# Altium PCB Asfaloth_L2_AVI_ver1.1.PcbDoc (part 2 of 2)
Units mil, origin at the board's own origin, x right, y up, seen from the top; angles counter-clockwise.
Board outline 4135 x 4330.71 mil, 2 copper layers (Top Layer, Bottom Layer); 82 components, 201 nets, 508 pads, 1168 vias.
Unrouted connection lines stored in the file: 2.
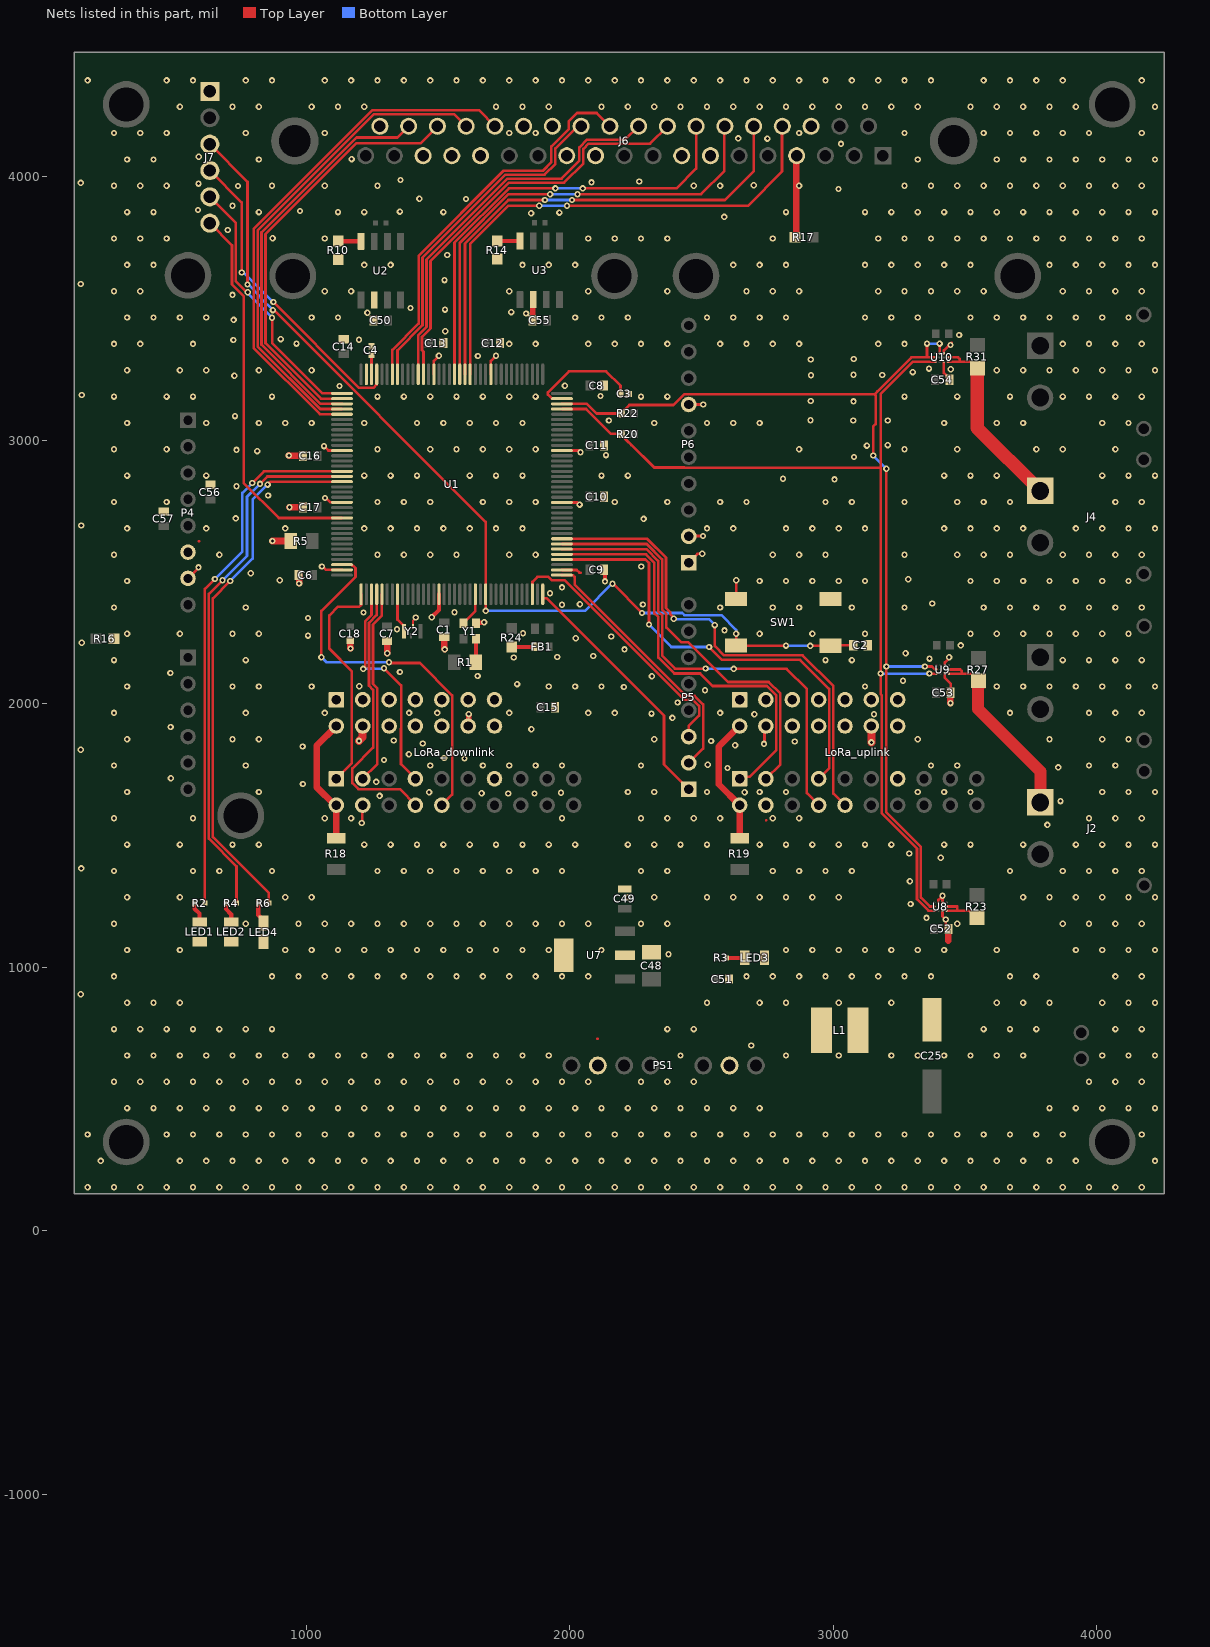
[diagram p2: the nets of this part, all layers, seen from the top]

## Via types
v1: diameter 24, hole 12, Top Layer to Bottom Layer, tented both sides, 1168 vias

## Nets (pads, with @x,y where several pads share a name; then routed paths per layer and width w, separated by ;. In a path a pad name is that pad's centre, name@x,y a point inside that pad or via, vN(x,y) a via of type N, cw(c..) or ccw(c..) an arc to the next point about the centre after c; other vN are vias at no path point) (continued)
GND: C1.2 C2.2 C3.2 C4.2 C6.2 C7.2 C8.2 C9.2 C10.2 C11.2 C12.2 C13.2 C14.2 C15.2 C16.2 C17.2 C18.2 C48.1 C49.2 C50.2 C52.2 C53.2 C54.2 C55.2 C56.2 C57.2 J6.4 J6.7 J6.8 J6.11 J6.12 J6.15 J6.16 J6.17 J6.22 J6.31 J6.32 J6.37 J7.1 LED1.1 LED2.1 LED3.1 LED4.1 LoRa_downlink.4 LoRa_downlink.24 LoRa_downlink.32 LoRa_uplink.4 LoRa_uplink.24 LoRa_uplink.32 P4.6 P4.7 P6.1 P6.2 P6.7 PS1.7 R5.2 R10.1 R14.1 R16.2 R17.1 SW1.3 SW1.4 U1.16 U1.38 U1.51 U1.61 U1.83 U1.94 U1.107 U1.120 U1.130 U1.143 U2.2 U3.2 U7.2 U7.4 U8.B3 U8.C1 U8.C3 U9.C1 U9.C3 U10.C1 U10.C3 Y1.2 Y2.2 | length 2676
  Top Layer w8: Y2.2@1406.38,2292.72 1406.38,2314.56 1416,2324.18 v1(1416,2327)
  Top Layer w10: R16.2@271.52,2247 R16.2@273,2248.48 ; C57.2@459,2730.56 C57.2@460,2729.56 ; P4.7@552,2475 592,2515 v1(592,2517) ; 593,2616 595,2616 ; C56.2@636,2831.56 C56.2@637,2830.56 ; v1(1060,2520) 1063.79,2520 1076.27,2507.52 U1.143@1136.28,2507.52 ; v1(1068,2977) 1084.72,2960.28 U1.120@1136.28,2960.28 ; v1(1072,2780) 1075.79,2780 1092.02,2763.77 1135.93,2763.77 U1.130@1136.28,2763.43 ; v1(1211,1547) 1213,1549 1213,1613 LoRa_downlink.4@1215,1615 ; LoRa_downlink.24@1214.43,1914.43 LoRa_downlink.24@1215,1915 ; C4.2@1248,3355.31 C4.2@1249.31,3354 ; U1.94@1484.7,3249.65 1484.7,3300.7 v1(1504,3320) ; C13.2@1520.5,3368.06 C13.2@1520.56,3368 ; U1.83@1701.24,3249.65 1701.24,3300.24 v1(1721,3320) ; C12.2@1736.12,3368 C12.2@1737,3368.88 ; U1.38@1970.92,2507.52 1971.27,2507.17 2026.83,2507.17 2037,2497 2042,2497 ; U1.51@1970.92,2763.43 2029.57,2763.43 v1(2038,2755) ; U1.61@1970.92,2960.28 2034.72,2960.28 v1(2041,2954) ; 2105,729 2106,728 ; PS1.7@2106,628 PS1.7@2107,627 ; C48.1@2299.05,1045.55 C48.1@2310.86,1057.36 ; P6.1@2452,2535 2485.41,2568.41 2502.41,2568.41 v1(2503,2569) ; P6.2@2452,2635 2453,2636 v1(2506,2636) ; P6.7@2452,3135 v1(2507,3135) ; SW1.4@2631.73,2396.77 2632,2397.04 v1(2632,2467.91) ; v1(2737.39,1847.39) 2739.57,1849.57 2739.57,1909.57 LoRa_uplink.24@2745,1915 ; LoRa_uplink.4@2745,1615 LoRa_uplink.4@2745.5,1614.5 ; 2745.5,1557.5 2746,1557 ; SW1.3@2990,2396.77 SW1.3@2994.23,2401 ; C2.2@3131.43,2221.58 C2.2@3132,2222.16 ; U8.B3@3399.25,1245.75 3399.25,1255.25 v1(3415,1271) U8.C3@3415,1245.75 ; U8.C1@3415,1214.25 3415,1192.87 v1(3427.21,1180.67) 3427.21,1155.36 C52.2@3437.56,1145 ; U10.C1@3419.75,3297.89 3419.75,3254.39 3441,3233.14 C54.2@3441,3229.2 ; U10.C3@3419.75,3329.39 3419.75,3340.75 v1@3449,3370 ; U9.C1@3423.75,2113.69 3423.75,2097.54 3445.56,2075.73 C53.2@3445.56,2041.43 ; U9.C3@3423.75,2145.18 3423.75,2155.86 3440,2172.11 v1(3440,2175.9)
  Top Layer w16: R10.1@1122.28,3685.2 R10.1@1122.56,3685.48 ; v1(1477,2328) 1504.39,2355.39 U1.16@1504.39,2415 ; Y1.2@1644.69,2305 1646.65,2306.97 1673.98,2306.97 v1(1675.51,2308.5) ; C55.2@1859,3455 C55.2@1860.28,3456.28 ; U3.2@1860.28,3531.5 U3.2@1861.56,3532.78 ; C10.2@2130,2785 C10.2@2131,2784 ; C9.2@2131,2508 2134,2505 v1(2134,2464)
  Top Layer w20: LoRa_downlink.32@1615,1915 1617.22,1917.22 v1(1617.22,1960.22) ; C55.2@1860.28,3456.28 U3.2@1860.28,3531.5
  Top Layer w25: v1(872,2617) R5.2@941.07,2617 ; v1(934.63,2941.63) 936.26,2940 C16.2@988.32,2940 ; v1(937,2745) C17.2@988.32,2745 ; C6.2@970.88,2487.83 973.74,2484.98 v1(973.74,2456) ; C18.2@1168,2238.43 1168,2210 v1(1168.5,2209.5) ; C50.2@1254,3452 C50.2@1256,3454 C50.2@1258.56,3456.56 ; C7.2@1307.44,2237.44 1307.44,2191.56 v1(1308,2191) ; C1.2@1524.44,2252.44 1524.44,2208.56 1526,2207 v1(1526,2206) ; J6.8@2425.39,4073.39 J6.8@2425.39,4079 ; J6.7@2532,4076.56 J6.7@2534.44,4079 ; R17.1@2859.48,3772 2860.55,3773.06 2860.55,4077.94 J6.4@2861.61,4079 ; 3436,1100 3436,1140.85 3434.71,1142.15 C52.2@3437.56,1145 ; v1(3445,2002) 3445,2040.87 C53.2@3445.56,2041.43
  Top Layer w30: v1(1200.69,1858.8) 1214.43,1872.54 LoRa_downlink.24@1214.43,1914.43 ; v1(3145,1853) LoRa_uplink.32@3145,1915
  other v1: 171,165 271,165 371,165 471,165 571,165 671,165 771,165 871,165 971,165 1071,165 1171,165 1271,165 1371,165 1471,165 1571,165 1671,165 1771,165 1871,165 1971,165 2071,165 2171,165 2271,165 2371,165 2471,165 2571,165 2671,165 2771,165 2871,165 2971,165 3071,165 3171,165 3271,165 3371,165 3471,165 3571,165 3671,165 3771,165 3871,165 3971,165 4071,165 4171,165 221,265 521,265 621,265 721,265 821,265 921,265 1021,265 1121,265 1221,265 1321,265 1421,265 1521,265 1621,265 1721,265 1821,265 1921,265 2021,265 2121,265 2221,265 2321,265 2421,265 2521,265 2621,265 2721,265 2821,265 2921,265 3021,265 3121,265 3221,265 3321,265 3421,265 3521,265 3621,265 3721,265 3821,265 3921,265 4221,265 171,365 471,365 571,365 671,365 771,365 871,365 971,365 1071,365 1171,365 1271,365 1371,365 1471,365 1571,365 1671,365 1771,365 1871,365 1971,365 2071,365 2171,365 2271,365 2371,365 2471,365 2571,365 2671,365 2771,365 2871,365 2971,365 3071,365 3171,365 3271,365 3371,365 3471,365 3571,365 3671,365 3771,365 3871,365 4171,365 321,465 421,465 521,465 621,465 721,465 821,465 921,465 1021,465 1121,465 1221,465 1321,465 1421,465 1521,465 1621,465 1721,465 1821,465 1921,465 2021,465 2121,465 2221,465 2321,465 2421,465 2521,465 2621,465 2721,465 3821,465 3921,465 4021,465 4121,465 4221,465 271,565 371,565 471,565 571,565 671,565 771,565 871,565 971,565 1071,565 1171,565 1271,565 1371,565 1471,565 1571,565 1671,565 1771,565 1871,565 1971,565 2071,565 2271,565 2371,565 2471,565 3971,565 4071,565 4171,565 321,665 421,665 521,665 621,665 721,665 821,665 921,665 1021,665 1121,665 1221,665 1321,665 1421,665 1521,665 1621,665 1721,665 1821,665 1921,665 2421,665 2821,665 3021,665 3221,665 3321,665 3421,665 3521,665 3621,665 3721,665 4021,665 4121,665 4221,665 2689,703 271,765 371,765 471,765 571,765 671,765 771,765 871,765 2371,765 2471,765 3571,765 3671,765 3771,765 4071,765 4171,765 321,865 421,865 521,865 2521,865 2721,865 2821,865 3021,865 3221,865 3621,865 3721,865 3821,865 4021,865 4121,865 4221,865 145,897 271,965 871,965 971,965 1071,965 1171,965 1271,965 1371,965 1471,965 1571,965 1671,965 1771,965 1871,965 1971,965 2071,965 2671,965 2771,965 2871,965 2971,965 3071,965 3171,965 3271,965 3371,965 3671,965 3771,965 4071,965 4171,965 2375,1049 321,1065 521,1065 921,1065 1021,1065 1121,1065 1221,1065 1321,1065 1421,1065 1521,1065 1621,1065 1721,1065 1821,1065 1921,1065 2121,1065 2821,1065 2921,1065 3021,1065 3121,1065 3221,1065 3321,1065 3421,1065 3621,1065 3921,1065 4021,1065 4121,1065 4221,1065 271,1165 771,1165 971,1165 1071,1165 1171,1165 1271,1165 1371,1165 1471,1165 1571,1165 1671,1165 1771,1165 1871,1165 1971,1165 2071,1165 2271,1165 2371,1165 3471,1165 3871,1165 3971,1165 4071,1165 4171,1165 3354,1187 3294,1240 321,1265 521,1265 921,1265 1021,1265 2221,1265 2321,1265 2521,1265 2621,1265 2721,1265 2821,1265 2921,1265 3021,1265 3721,1265 3821,1265 3921,1265 4021,1265 4121,1265 4221,1265 3291,1326 271,1365 571,1365 671,1365 871,1365 1271,1365 1371,1365 1471,1365 1571,1365 1671,1365 1771,1365 1871,1365 1971,1365 2271,1365 2371,1365 2771,1365 2871,1365 2971,1365 3071,1365 3671,1365 3871,1365 3971,1365 4071,1365 4171,1365 147,1375 3408,1415 3289,1431 321,1465 521,1465 721,1465 821,1465 1221,1465 1321,1465 1421,1465 1521,1465 1621,1465 1721,1465 1821,1465 1921,1465 2021,1465 2221,1465 2321,1465 2421,1465 2521,1465 2721,1465 2821,1465 2921,1465 3021,1465 3121,1465 3221,1465 3421,1465 3521,1465 3721,1465 3921,1465 4021,1465 4121,1465 4221,1465 3813,1540 271,1565 571,1565 1071,1565 1171,1565 1971,1565 2271,1565 2371,1565 2471,1565 2571,1565 2771,1565 2871,1565 3971,1565 4071,1565 4171,1565 3863,1630 1279,1650 1767,1659 1867,1659 1666,1660 1967,1662 1467,1664 2664,1664 321,1665 821,1665 2221,1665 2321,1665 2521,1665 2721,1665 2821,1665 3321,1665 3421,1665 3521,1665 4021,1665 4121,1665 4221,1665 988,1695 1266,1703 487,1717 2599,1756 3854,1758 271,1765 771,1765 1471,1765 1671,1765 1771,1765 1871,1765 1971,1765 2271,1765 3371,1765 3471,1765 3971,1765 4071,1765 2524,1768 1296,1786 1601,1792 1524,1794 1390,1808 145,1825 987,1837 2628,1842 1443,1849 2854,1856 2537,1858 1333,1860 321,1865 721,1865 821,1865 2321,1865 3321,1865 3821,1865 4021,1865 4121,1865 1855,1903 486,1911 2390,1946 2701,1960 3155,1960 2311,1962 271,1965 771,1965 1071,1965 1391,1965 1498,1965 1771,1965 2071,1965 2171,1965 2571,1965 3671,1965 3971,1965 4071,1965 4171,1965 2410,2004 2514,2051 2206,2063 321,2065 721,2065 821,2065 1021,2065 1921,2065 2021,2065 2121,2065 3121,2065 3621,2065 3721,2065 3821,2065 3921,2065 4021,2065 4121,2065 4221,2065 1202,2066 1801,2074 3265,2087 2311.98,2103.96 1651,2105 485,2116 1356,2120 271,2165 771,2165 2971,2165 3071,2165 3871,2165 3971,2165 4071,2165 4171,2165 3365.68,2170.81 1788,2175 1953,2177 2090,2181 3275,2191 2208,2206 3484,2221 149,2231 2023.43,2247.99 2158,2255 1007,2258 321,2265 521,2265 721,2265 821,2265 2721,2265 2921,2265 3121,2265 3521,2265 3621,2265 3721,2265 3821,2265 3921,2265 4021,2265 4121,2265 1823,2267 2588,2278 1345,2282 1007,2325 1218,2346 1563,2347 271,2365 771,2365 2571,2365 2771,2365 2871,2365 3071,2365 3271,2365 3571,2365 3671,2365 3771,2365 3871,2365 3971,2365 4071,2365 4171,2365 1971.02,2375.26 2278,2376 2039,2377 3376,2380 1925.83,2418.81 1971,2441 321,2465 2721,2465 2821,2465 2921,2465 3021,2465 3121,2465 3521,2465 3621,2465 3721,2465 3821,2465 3921,2465 4021,2465 4121,2465 900,2468 3285,2472 790,2495 2272,2520 271,2565 671,2565 1271,2565 1371,2565 1471,2565 1571,2565 1771,2565 1871,2565 2771,2565 2871,2565 2971,2565 3271,2565 3471,2565 3571,2565 3671,2565 3871,2565 3971,2565 4071,2565 4171,2565 321,2665 621,2665 921,2665 1221,2665 1321,2665 1421,2665 1521,2665 1621,2665 1721,2665 1821,2665 2521,2665 2621,2665 2821,2665 2921,2665 3021,2665 3121,2665 3421,2665 3521,2665 3621,2665 3721,2665 3921,2665 4021,2665 4121,2665 4221,2665 147,2676 2281,2701 733,2703 271,2765 471,2765 1271,2765 1371,2765 1471,2765 1671,2765 1771,2765 1871,2765 2171,2765 2371,2765 2571,2765 2671,2765 2971,2765 3071,2765 3271,2765 3471,2765 3571,2765 3671,2765 4071,2765 4171,2765 856,2790 736,2825 3005,2851 2810,2853 321,2865 621,2865 1221,2865 1321,2865 1421,2865 1621,2865 1721,2865 1821,2865 2121,2865 2221,2865 3421,2865 3521,2865 3621,2865 4021,2865 4121,2865 4221,2865 3079,2936 2138,2943 815,2958 736,2963 271,2965 471,2965 1271,2965 1471,2965 1571,2965 1671,2965 1771,2965 1871,2965 2871,2965 3271,2965 3471,2965 3771,2965 3871,2965 4071,2965 3128,2979 3207,2981 321,3065 621,3065 821,3065 921,3065 1021,3065 1221,3065 1421,3065 1521,3065 1621,3065 1721,3065 1821,3065 2321,3065 2521,3065 2621,3065 2721,3065 3421,3065 3621,3065 3721,3065 4021,3065 4121,3065 2149,3074 3076,3074 3207,3074 2914,3075 730,3091 3077,3147 2915,3148 271,3165 471,3165 571,3165 871,3165 1271,3165 1371,3165 1471,3165 1571,3165 1671,3165 1771,3165 1871,3165 2271,3165 2371,3165 3271,3165 3471,3165 3671,3165 3871,3165 3971,3165 4071,3165 4171,3165 2117,3167 149,3171 1127,3205 1982,3206 728,3244 2916,3246 3186,3247 3077,3248 3302,3258 321,3265 521,3265 621,3265 821,3265 1021,3265 3621,3265 3721,3265 3821,3265 3921,3265 4021,3265 4121,3265 4221,3265 3446,3269 3364,3271 2915,3306 3078,3308 1652,3319 3445,3361 271,3365 371,3365 571,3365 1771,3365 1871,3365 2071,3365 2171,3365 2271,3365 2371,3365 2571,3365 2671,3365 2771,3365 2871,3365 3171,3365 3271,3365 3871,3365 3971,3365 4071,3365 4171,3365 964,3366 724,3380 1201,3381 904,3383 3478,3399 1528,3413 725,3456 321,3465 421,3465 521,3465 621,3465 1021,3465 1121,3465 2021,3465 2121,3465 2221,3465 2521,3465 2621,3465 2721,3465 2821,3465 3121,3465 3221,3465 3321,3465 3521,3465 3621,3465 3721,3465 3821,3465 3921,3465 4021,3465 4121,3465 1835,3480 1232.72,3482.9 1778.6,3485.52 1527,3495 1396,3501 721,3551 271,3565 371,3565 1071,3565 1171,3565 1771,3565 2071,3565 2371,3565 2671,3565 2771,3565 2871,3565 3171,3565 3271,3565 3371,3565 3471,3565 3571,3565 3871,3565 3971,3565 4071,3565 4171,3565 145,3592 1525,3607 321,3665 421,3665 1221,3665 1321,3665 1821,3665 1921,3665 2021,3665 2621,3665 2721,3665 2821,3665 3121,3665 3221,3665 3321,3665 3421,3665 3521,3665 3821,3665 3921,3665 4021,3665 4121,3665 4221,3665 1536,3702 271,3765 371,3765 471,3765 1071,3765 2071,3765 2171,3765 2271,3765 2371,3765 2771,3765 3171,3765 3271,3765 3371,3765 3471,3765 3571,3765 3671,3765 3771,3765 3871,3765 3971,3765 4071,3765 4171,3765 873,3766 703,3797 2587,3847 1854,3861 1961,3863 321,3865 421,3865 821,3865 1121,3865 1221,3865 1521,3865 2821,3865 3121,3865 3221,3865 3321,3865 3421,3865 3521,3865 3621,3865 3721,3865 3821,3865 3921,3865 4021,3865 4121,3865 4221,3865 1356,3867 977,3869 590,3873 721,3889 1607,3915 1430,3916 3020,3953 742,3964 271,3965 371,3965 471,3965 871,3965 1071,3965 1271,3965 2471,3965 2571,3965 2871,3965 3271,3965 3371,3965 3471,3965 3571,3965 3671,3965 3771,3965 3871,3965 3971,3965 4071,3965 4171,3965 2699,3967 592,3973 145,3976 2083,3978 2264,3981 1358,3987 321,4065 421,4065 821,4065 3321,4065 3621,4065 3721,4065 3821,4065 3921,4065 4021,4065 4121,4065 4221,4065 1173,4066 593,4075 3030,4124 2750.29,4143.89 2640,4145 271,4165 371,4165 471,4165 771,4165 1071,4165 1771,4165 1871,4165 2871,4165 3271,4165 3571,4165 3671,4165 3771,4165 3871,4165 3971,4165 4171,4165 521,4265 721,4265 821,4265 1021,4265 1121,4265 1221,4265 1721,4265 1821,4265 1921,4265 2121,4265 2221,4265 2321,4265 2421,4265 2521,4265 2621,4265 2721,4265 2821,4265 2921,4265 3021,4265 3121,4265 3221,4265 3321,4265 3521,4265 3621,4265 3721,4265 3821,4265 3921,4265 4221,4265 171,4365 471,4365 571,4365 771,4365 871,4365 1071,4365 1171,4365 1271,4365 1371,4365 1471,4365 1571,4365 1671,4365 1771,4365 1871,4365 1971,4365 2071,4365 2171,4365 2271,4365 2371,4365 2471,4365 2571,4365 2671,4365 2771,4365 2871,4365 2971,4365 3071,4365 3171,4365 3271,4365 3371,4365 3571,4365 3671,4365 3771,4365 3871,4365 4171,4365
IN-_PM1: C25.1 L1.1 R23.2 U8.D1 U8.D2 | length 182.5
  Top Layer w10: U8.D1@3430.75,1214.25 3472,1214.25 ; U8.D2@3430.75,1230 3471,1230 3471,1215.25 3472,1214.25 ; R23.2@3545,1186.69 3544.21,1186.69 3521.65,1209.25 3521.65,1210.04 3517.44,1214.25 3472,1214.25
IN-_PM2: J2.P R27.2 U9.D1 U9.D2 | length 777.6
  Top Layer w10: U9.D1@3439.5,2113.69 3481.07,2113.69 3486,2113.69 ; U9.D2@3439.5,2129.43 3481.75,2129.43 3487.61,2123.58 3487.61,2115.29 3486,2113.69 ; R27.2@3574.35,2062.78 3574.35,2063.57 3551.79,2086.13 R27.2@3551,2086.13 3550.21,2086.13 3522.65,2113.69 3486,2113.69
  Top Layer w45: R27.2@3551,2086.13 3549.23,2084.35 3549.23,1980.08 3786.3,1743 J2.P@3786.3,1624.96
IN-_PM3: J4.P R31.2 U10.D1 U10.D2 | length 743.6
  Top Layer w10: U10.D1@3435.5,3297.89 3478.22,3297.89 ; U10.D2@3435.5,3313.64 3473.97,3313.64 3479.83,3307.78 3479.83,3299.5 3478.22,3297.89 ; R31.2@3547,3272.63 3546.21,3272.63 3520.95,3297.89 3483,3297.89 3478.22,3297.89
  Top Layer w50: R31.2@3547,3272.63 3547,3045.36 J4.P@3785.3,2807.06
MISO_SD: J6.34 U1.112 | length 1851.9
  Top Layer w10: U1.112@1136.28,3117.76 1053.82,3117.76 816,3355.57 816,3795 1258,4237 1561.28,4237 J6.34@1607.47,4190.81
MISO_U_LoRa_downlink: LoRa_downlink.8 U1.4 | length 1042.4
  Top Layer w10: U1.4@1268.17,2415 1268.17,2335.49 1239,2306.33 1239,2068.11 1254.53,2052.59 1254.53,1833.31 1175.47,1754.26 1175.47,1698.63 1198.63,1675.47 1355.53,1675.47 1415,1616 LoRa_downlink.8@1415,1615
MISO_U_LoRa_uplink: LoRa_uplink.8 U1.42 | length 1809.5
  Top Layer w10: U1.42@1970.92,2586.26 2291.17,2586.26 2336,2541.43 2336,2350.25 2352,2334.25 2352,2181 2400,2133 v1(2516,2133) ; v1(2623,2132) 2823,2132 2900,2055 2900,1660 LoRa_uplink.8@2945,1615
  Bottom Layer w10: v1(2516,2133) 2622,2133 v1(2623,2132)
MOSI_SD: J6.33 U1.113 | length 2018.8
  Top Layer w10: U1.113@1136.28,3098.07 1052.29,3098.07 801,3349.36 801,3801.21 1251.79,4252 1655.34,4252 J6.33@1716.53,4190.81
MOSI_U_LoRa_downlink: LoRa_downlink.3 U1.5 | length 743
  Top Layer w10: LoRa_downlink.3@1215,1715 1269.53,1769.53 1269.53,2058.8 1254,2074.33 1254,2300.11 1287.85,2333.96 U1.5@1287.85,2415
MOSI_U_LoRa_uplink: LoRa_uplink.3 U1.43 | length 1551.3
  Top Layer w10: U1.43@1970.92,2605.94 2292.7,2605.94 2351,2547.64 2351,2356.46 2367,2340.46 2367,2289 2423,2233 2449.9,2233 2600.9,2082 2755.11,2082 2799.53,2037.59 2799.53,1769.53 LoRa_uplink.3@2745,1715
NetANT_HF_U_LoRa_downlink_1: 
NetANT_HF_U_LoRa_uplink_1: 
NetANT_LF_U_LoRa_downlink_1: 
NetANT_LF_U_LoRa_uplink_1: 
NetC1_U_LoRa_downlink_2: 
NetC1_U_LoRa_uplink_2: 
NetC2_U_LoRa_downlink_2: 
NetC2_U_LoRa_uplink_2: 
NetC3_1: C3.1 U1.71 | length 431.8
  Top Layer w10: U1.71@1970.92,3157.13 1970.57,3157.47 1932.33,3157.47 1917.14,3172.67 1917.14,3180.95 1997.18,3261 2139,3261 2192.88,3207.12 C3.1@2192.88,3175
NetC4_1: C4.1 U1.106 | length 75.2
  Top Layer w10: C4.1@1248,3324.68 1248.24,3324.44 1248.24,3249.89 U1.106@1248.48,3249.65
NetC4_U_LoRa_downlink_2: 
NetC4_U_LoRa_uplink_2: 
NetC5_U_LoRa_downlink_2: 
NetC5_U_LoRa_uplink_2: 
NetC7_U_LoRa_downlink_2: 
NetC7_U_LoRa_uplink_2: 
NetC9_U_LoRa_downlink_1: 
NetC9_U_LoRa_downlink_2: 
NetC9_U_LoRa_uplink_1: 
NetC9_U_LoRa_uplink_2: 
NetC11_U_LoRa_downlink_2: 
NetC11_U_LoRa_uplink_2: 
NetC12_U_LoRa_downlink_1: 
NetC12_U_LoRa_uplink_1: 
NetC14_U_LoRa_downlink_1: 
NetC14_U_LoRa_uplink_1: 
NetC16_U_LoRa_downlink_2: 
NetC16_U_LoRa_uplink_2: 
NetC17_U_LoRa_downlink_2: 
NetC17_U_LoRa_uplink_2: 
NetC18_U_LoRa_downlink_1: 
NetC18_U_LoRa_uplink_1: 
NetC19_U_LoRa_downlink_1: 
NetC19_U_LoRa_downlink_2: 
NetC19_U_LoRa_uplink_1: 
NetC19_U_LoRa_uplink_2: 
NetC20_U_LoRa_downlink_1: 
NetC20_U_LoRa_downlink_2: 
NetC20_U_LoRa_uplink_1: 
NetC20_U_LoRa_uplink_2: 
NetC22_U_LoRa_downlink_1: 
NetC22_U_LoRa_uplink_1: 
NetC28_U_LoRa_downlink_1: 
NetC28_U_LoRa_downlink_2: 
NetC28_U_LoRa_uplink_1: 
NetC28_U_LoRa_uplink_2: 
NetC30_U_LoRa_downlink_2: 
NetC30_U_LoRa_uplink_2: 
NetC31_U_LoRa_downlink_1: 
NetC31_U_LoRa_uplink_1: 
NetC33_U_LoRa_downlink_1: 
NetC33_U_LoRa_uplink_1: 
NetC36_U_LoRa_downlink_1: 
NetC36_U_LoRa_downlink_2: 
NetC36_U_LoRa_uplink_1: 
NetC36_U_LoRa_uplink_2: 
NetC38_U_LoRa_downlink_1: 
NetC38_U_LoRa_downlink_2: 
NetC38_U_LoRa_uplink_1: 
NetC38_U_LoRa_uplink_2: 
NetC39_U_LoRa_downlink_1: 
NetC39_U_LoRa_downlink_2: 
NetC39_U_LoRa_uplink_1: 
NetC39_U_LoRa_uplink_2: 
NetC42_U_LoRa_downlink_1: 
NetC42_U_LoRa_uplink_1: 
NetFB1_2: FB1.2 R24.1 | length 87.5
  Top Layer w15: R24.1@1779.98,2215.48 FB1.2@1867.44,2215.48
NetL3_U_LoRa_downlink_2: 
NetL3_U_LoRa_uplink_2: 
NetL12_U_LoRa_downlink_1: 
NetL12_U_LoRa_uplink_1: 
NetLED1_2: LED1.2 R2.2 | length 79.7
  Top Layer w16: R2.2@575.82,1243.02 577.17,1241.67 577.17,1221.83 595.25,1203.75 LED1.2@595.25,1171.4
NetLED2_2: LED2.2 R4.2 | length 80
  Top Layer w16: R4.2@695.82,1243.02 695.82,1220.18 716,1200 LED2.2@716,1171.4
NetLED3_2: LED3.2 R3.2 | length 68.8
  Top Layer w15: R3.2@2595.75,1035 LED3.2@2664.6,1035
NetLED4_2: LED4.2 R6.2 | length 82.9
  Top Layer w16: R6.2@818.47,1243.02 818.47,1197.5 838.65,1177.32 LED4.2@838.65,1168.46
NetR1_1: R1.1 Y1.1 | length 88.9
  Top Layer w16: R1.1@1644.69,2157 Y1.1@1644.69,2245.94
NetR6_U_LoRa_downlink_1: 
NetR6_U_LoRa_uplink_1: 
NetR7_U_LoRa_downlink_1: 
NetR7_U_LoRa_uplink_1: 
NetR10_2: R10.2 U2.8 | length 86.1
  Top Layer w16: R10.2@1122.56,3754.52 1208.26,3754.52 U2.8@1208.56,3754.22
NetR10_U_LoRa_downlink_2: 
NetR10_U_LoRa_uplink_2: 
NetR14_2: R14.2 U3.8 | length 86.1
  Top Layer w16: R14.2@1725.56,3755.52 1811.26,3755.52 U3.8@1811.56,3755.22
NetU1_8: U1.8 Y2.3 | length 150
  Top Layer w10: U1.8@1346.91,2415 1346.91,2318.73 1370.95,2294.69 Y2.3@1370.95,2275
NetU1_23: U1.23 Y1.3 | length 128.7
  Top Layer w10: Y1.3@1597.44,2305 1597.18,2305.26 1597.18,2306.71 1642.18,2351.71 U1.23@1642.18,2415
NRESET_U_LoRa_downlink: LoRa_downlink.10 U1.142 | length 1438.2
  Top Layer w10: v1(1058,2176) 1058,2351.63 1187.61,2481.25 1187.61,2514.11 1178.3,2523.43 1175.98,2523.43 1172.2,2527.2 U1.142@1136.28,2527.2 ; v1(1315,2157) 1318,2154 1431.9,2154 1554.53,2031.37 1554.53,1998.63 1554,1998.1 1554,1931.9 1554.53,1931.37 1554.53,1654.53 LoRa_downlink.10@1515,1615
  Bottom Layer w10: v1(1058,2176) 1058.11,2176 1077.11,2157 v1(1315,2157)
NRESET_U_LoRa_uplink: LoRa_uplink.10 U1.44 | length 1896.5
  Top Layer w10: U1.44@1970.92,2625.63 2294.22,2625.63 2366,2553.85 2366,2362.67 2382,2346.67 2382,2338.79 2395,2325.79 v1(2395,2322) ; v1(2551,2298) 2551,2218.48 2586.25,2183.23 2883.77,2183.23 3001,2066 3001,1659 LoRa_uplink.10@3045,1615
  Bottom Layer w10: v1(2395,2322) 2396.53,2320.47 2528.53,2320.47 v1(2551,2298)
NRST_STM: C2.1 J7.3 SW1.1 SW1.2 U1.25 | length 3779.8
  Top Layer w10: J7.3@635,4123 777.81,3980.19 v1(777.81,3590.07) ; v1(874,3493) 878.01,3493 1681.55,2689.46 U1.25@1681.55,2415 1681.78,2414.78 1681.78,2352.22 v1(1682,2352) ; v1(2163,2455) 2164,2455 v1(2275,2344) ; v1(2631.73,2265) SW1.2@2631.73,2220.39 2632.13,2220 v1(2821,2220) ; v1(2913,2219) 2989,2219 SW1.1@2990,2220 2991.58,2221.58 C2.1@3076.31,2221.58
  Bottom Layer w10: v1(777.81,3590.07) 781.14,3590.07 827.46,3543.75 827.46,3539.54 v1(874,3493) ; v1(1682,2352) 2058.11,2352 2161.11,2455 v1(2163,2455) ; v1(2275,2344) 2427.1,2344 2435.63,2335.47 2576.53,2335.47 2631.73,2280.27 v1(2631.73,2265) ; v1(2821,2220) 2821.5,2219.5 2912.5,2219.5 v1(2913,2219)
NSS_SD: J6.35 U1.110 | length 1613.4
  Top Layer w10: U1.110@1136.28,3157.13 1056.87,3157.13 846,3368 846,3782 1190,4126 1433.61,4126 J6.35@1498.42,4190.81
NSS_U_LoRa_downlink: LoRa_downlink.7 U1.3 | length 845.2
  Top Layer w10: v1(1217,2132) 1218.14,2132 1224,2137.86 1224,2312.54 1248.48,2337.02 U1.3@1248.48,2415 ; v1(1296,2134) 1360.47,2069.53 1360.47,1904.57 1360,1904.1 1360,1770 LoRa_downlink.7@1415,1715
  Bottom Layer w10: v1(1217,2132) 1294,2132 v1(1296,2134)
NSS_U_LoRa_uplink: LoRa_uplink.7 U1.40 | length 1711.1
  Top Layer w10: U1.40@1970.92,2546.89 2288.11,2546.89 2301,2534 v1(2301,2300) ; v1(2529.33,2214.71) 2578.03,2166 2874,2166 2984.53,2055.47 2984.53,1754.53 LoRa_uplink.7@2945,1715
  Bottom Layer w10: v1(2301,2300) 2386,2215 2529.03,2215 v1(2529.33,2214.71)
PG9: R2.1 U1.124 | length 2027.2
  Top Layer w10: R2.1@616.18,1243.02 616.18,2435.18 v1(654,2473) ; v1(796,2837) 840.54,2881.54 U1.124@1136.28,2881.54
  Bottom Layer w10: v1(654,2473) 758,2577 758,2799 v1(796,2837)
PG10: R4.1 U1.125 | length 2037.6
  Top Layer w10: v1(683,2468) 631.18,2416.18 631.18,1487.61 736.18,1382.61 R4.1@736.18,1243.02 ; v1(825,2834) 853,2862 1136.13,2862 U1.125@1136.23,2861.9
  Bottom Layer w10: v1(683,2468) 776,2561 776,2785 v1(825,2834)
PG11: R6.1 U1.126 | length 2049
  Top Layer w10: v1(712,2465) 646.18,2399.18 646.18,1493.82 858.83,1281.17 R6.1@858.83,1243.02 ; v1(854,2831) 865.17,2842.17 U1.126@1136.28,2842.17
  Bottom Layer w10: v1(712,2465) 797,2550 797,2774 v1(854,2831)
RTS_IMU: P5.3 U1.34 | length 1023.5
  Top Layer w10: U1.34@1858.72,2415 1859.06,2415.35 1859.06,2462.36 1878.05,2481.34 1919.49,2481.34 1932.83,2468 1981.89,2468 2435.36,2014.53 2468.37,2014.53 2491.53,1991.37 2491.53,1954.53 2452,1915 P5.3@2452,1875
RX_IMU: P5.2 U1.37 | length 1000.8
  Top Layer w10: U1.37@1970.92,2487.83 1971.27,2487.49 2012.58,2487.49 2019,2481.07 2019,2452.1 2441.57,2029.53 2474.59,2029.53 2506.53,1997.59 2506.53,1829.53 P5.2@2452,1775
RXTX_RF_sx_U_LoRa_downlink: 
RXTX_RF_sx_U_LoRa_uplink: 
RXTX_U_LoRa_downlink: LoRa_downlink.13
RXTX_U_LoRa_uplink: LoRa_uplink.13
SCK_SD: J6.36 U1.111 | length 1549.8
  Top Layer w10: U1.111@1136.28,3137.44 1055.35,3137.44 831,3361.79 831,3788.21 1191.12,4148.33 1346.88,4148.33 J6.36@1389.36,4190.81
SCK_U_LoRa_downlink: LoRa_downlink.1 U1.1 | length 857.7
  Top Layer w10: LoRa_downlink.1@1115,1715 1173.79,1773.79 1173.79,2122.42 1088,2208.21 1088,2335 1121,2368 1202.35,2368 1208.76,2374.42 1208.76,2414.65 U1.1@1209.11,2415
SCK_U_LoRa_uplink: LoRa_uplink.1 U1.41 | length 1629.4
  Top Layer w10: U1.41@1970.92,2566.57 2289.64,2566.57 2321,2535.21 2321,2344.03 2337,2328.03 2337,2174.79 2397.26,2114.53 2495.47,2114.53 2543,2067 2748.9,2067 2784.53,2031.37 2784.53,1823.53 2683.67,1722.67 2652.67,1722.67 LoRa_uplink.1@2645,1715
SCL_STM: R20.1 U1.69 U8.A1 U9.A1 U10.A1 | length 3830.6
  Top Layer w10: U1.69@1970.92,3117.76 2062.67,3117.76 2156.43,3024 2193.25,3024 2199.25,3018 2222.55,2992.78 2234.26,2981.06 2318.32,2898.85 2321.24,2896 2325.32,2896 2435.1,2896 2435.63,2895.47 3180,2895.47 ; v1(3365,2114) 3391.94,2114 U9.A1@3392.25,2113.69 ; U8.A1@3383.5,1214.25 3361.53,1214.25 3318,1257.79 3318,1450 3184.53,1583.47 3184.53,2031.37 3180,2035.9 v1(3180,2114) 3180,2895.47 ; U10.A1@3388.25,3297.89 3302.89,3297.89 3180,3175 3180,2895.47
  Bottom Layer w10: v1(3180,2114) v1(3365,2114)
SCL_U_LoRa_downlink: LoRa_downlink.23
SCL_U_LoRa_uplink: LoRa_uplink.23
SDA_STM: R22.1 U1.70 U8.A2 U9.A2 U10.A2 U10.B3 | length 3905
  Top Layer w10: U1.70@1970.92,3137.44 2065.56,3137.44 2102,3101 R22.1@2195.44,3101 2195.44,3102.06 2226.38,3133 2394.1,3133 2435.63,3174.53 3154.47,3174.53 ; v1(3152,2941.75) 3152,3051.39 3161,3060.39 3161,3170 3158.5,3172.5 ; 3157.17,3173.17 3168,3184 3168,3184.21 3297.42,3313.64 3358.54,3313.64 ; v1(3202,2891) v1(3202,2141) 3202,1587.21 3333,1456.21 3333,1264 3367,1230 U8.A2@3383.5,1230 ; v1(3348,2141) 3375.22,2141 3386.79,2129.43 U9.A2@3392.25,2129.43 ; v1(3356,3366) 3356,3316.18 3358.54,3313.64 ; U10.A2@3388.25,3313.64 3358.54,3313.64 ; U10.B3@3404,3329.39 v1(3404,3366)
  Bottom Layer w10: v1(3152,2941.75) 3152,2941 v1(3202,2891) ; v1(3202,2141) v1(3348,2141) ; v1(3356,3366) v1(3404,3366)
SDA_U_LoRa_downlink: LoRa_downlink.21
SDA_U_LoRa_uplink: LoRa_uplink.21
Spare_DIO0: J6.23 U1.87 | length 1964.3
  Top Layer w10: U1.87@1622.5,3249.65 1622.5,3744.5 1767,3889 v1(1885,3889) ; v1(1989.89,3889) 2676,3889 2806,4019 2806,4189.73 J6.23@2807.08,4190.81
  Bottom Layer w10: v1(1885,3889) v1(1989.89,3889)
Spare_DIO1: J6.24 U1.88 | length 1875.9
  Top Layer w10: U1.88@1602.81,3249.65 1602.81,3746.02 1767.79,3911 v1(1906,3911) ; v1(2009,3911) 2589,3911 2698.02,4020.02 J6.24@2698.02,4190.81
  Bottom Layer w10: v1(1906,3911) v1(2009,3911)
Spare_DIO2: J6.25 U1.89 | length 1786.6
  Top Layer w10: U1.89@1583.13,3249.65 1583.13,3747.55 1768.57,3933 v1(1926,3933) ; v1(2030,3933) 2499,3933 2587.39,4021.39 J6.25@2587.39,4192.39
  Bottom Layer w10: v1(1926,3933) v1(2030,3933)
Spare_DIO3: J6.26 U1.90 | length 1693.1
  Top Layer w10: U1.90@1563.44,3249.65 1563.44,3749.08 1769.36,3955 v1(1946,3955) ; v1(2050,3955) 2405,3955 2479.91,4029.91 J6.26@2479.91,4190.81
  Bottom Layer w10: v1(1946,3955) v1(2050,3955)
Spare_RX: J6.28 U1.97 | length 1493
  Top Layer w10: U1.97@1425.65,3249.65 1425.65,3334.53 1425.09,3335.08 1425.09,3397.65 1457,3429.56 1457,3685.07 1763.93,3992 1969,3992 2037,4060 2037,4111 2066,4140 2210.99,4140 J6.28@2261.8,4190.81
Spare_TX: J6.27 U1.96 | length 1587.6
  Top Layer w10: U1.96@1445.33,3249.65 1445.33,3336.05 1440.09,3341.3 1440.09,3391.43 1472,3423.35 1472,3678.85 1770.15,3977 1979,3977 2052,4050 2052,4104.79 2072.21,4125 2305.05,4125 J6.27@2370.86,4190.81
SWO: J7.6 U1.133 | length 1466.6
  Top Layer w10: J7.6@635,3823 718.81,3739.19 718.81,3590.17 763,3545.99 763,2838 896.63,2704.37 U1.133@1136.28,2704.37
SX_GPIO0_U_LoRa_downlink: LoRa_downlink.25
SX_GPIO0_U_LoRa_uplink: LoRa_uplink.25
SX_GPIO1_U_LoRa_downlink: LoRa_downlink.26
SX_GPIO1_U_LoRa_uplink: LoRa_uplink.26
SX_GPIO2_U_LoRa_downlink: LoRa_downlink.27
SX_GPIO2_U_LoRa_uplink: LoRa_uplink.27
SX_GPIO3_U_LoRa_downlink: LoRa_downlink.28
SX_GPIO3_U_LoRa_uplink: LoRa_uplink.28
SX_GPIO4_U_LoRa_downlink: LoRa_downlink.29
SX_GPIO4_U_LoRa_uplink: LoRa_uplink.29
SX_GPIO5_U_LoRa_downlink: LoRa_downlink.30
SX_GPIO5_U_LoRa_uplink: LoRa_uplink.30
SX_GPIO6_U_LoRa_downlink: LoRa_downlink.31
SX_GPIO6_U_LoRa_uplink: LoRa_uplink.31
SX_GPIO7_U_LoRa_downlink: LoRa_downlink.33
SX_GPIO7_U_LoRa_uplink: LoRa_uplink.33
TCK: J7.5 U1.109 | length 999.1
  Top Layer w10: J7.5@635,3923 733.81,3824.19 733.81,3602.07 774.79,3561.1 v1(779,3561.1) ; v1(871,3464) 871,3369 1062.6,3177.4 1135.68,3177.4 U1.109@1136.28,3176.81
  Bottom Layer w10: v1(779,3561.1) 781.68,3558.42 781.68,3553.82 871,3464.5 v1(871,3464)
TMS: J7.4 U1.105 | length 1174.4
  Top Layer w10: J7.4@635,4023 755.81,3902.19 v1(755.81,3636) ; v1(876,3524) 1201.69,3198.31 1255.07,3198.31 1267.82,3211.06 1267.82,3249.3 U1.105@1268.17,3249.65
  Bottom Layer w10: v1(755.81,3636) 763,3636 875,3524 v1(876,3524)
TX_IMU: P5.1 U1.36 | length 977.8
  Top Layer w10: U1.36@1898.09,2415 1898.09,2400.79 1898.92,2399.95 1913.13,2399.95 2358,1955.09 2358,1769.21 2417,1710.21 2417,1710 P5.1@2452,1675
UART2TTL_RX: J6.29 U1.102 | length 1514.2
  Top Layer w10: U1.102@1327.22,3249.65 1327.22,3342.21 1427,3441.99 1427,3699 1750,4022 1898.57,4022 1931,4054.43 1931,4114 1997,4180 1997,4210 2028,4241 2102.56,4241 J6.29@2152.75,4190.81
UART2TTL_TX: J6.30 U1.101 | length 1324.5
  Top Layer w10: U1.101@1346.91,3249.65 1346.91,3340.68 1442,3435.77 1442,3692 1757,4007 1904.79,4007 1946,4048.21 1946,4107 2029.81,4190.81 J6.30@2043.69,4190.81
VDD_ANA: LoRa_downlink.2 LoRa_downlink.22 LoRa_uplink.2 LoRa_uplink.22 R18.2 R19.2 | length 983.8
  Top Layer w25: R18.2@1115,1489.06 LoRa_downlink.2@1115,1615 1108.64,1615 1040,1683.64 1040,1840 LoRa_downlink.22@1115,1915 ; R19.2@2645,1489.06 LoRa_uplink.2@2645,1615 2566,1694 2566,1837 2644,1915 LoRa_uplink.22@2645,1915
VDD_FEM: LoRa_downlink.34 LoRa_uplink.34
VDD_RFS: 
VIN_DCDC: C51.1 L1.2 PS1.2
pads on no net: J2.S1 J2.S2 J3.S1 J3.S2 J4.S1 J4.S2 J5.S1 J5.S2 LoRa_downlink.15 LoRa_uplink.15 P3.1 P3.2 P3.3 P3.4 P3.5 P3.6 P4.1 P4.2 P4.3 P4.8 P5.5 P5.6 P5.7 P5.8 P6.3 P6.4 P6.5 P6.6 P6.8 P6.9 P6.10 PS1.3 PS1.5 PS1.8 U1.2 U1.7 U1.9 U1.10 U1.11 U1.12 U1.13 U1.14 U1.15 U1.18 U1.19 U1.20 U1.21 U1.22 U1.24 U1.26 U1.47 U1.48 U1.49 U1.50 U1.53 U1.54 U1.55 U1.56 U1.57 U1.58 U1.59 U1.60 U1.63 U1.64 U1.65 U1.75 U1.76 U1.77 U1.78 U1.79 U1.80 U1.81 U1.82 U1.85 U1.86 U1.91 U1.92 U1.93 U1.98 U1.99 U1.100 U1.114 U1.115 U1.116 U1.117 U1.118 U1.119 U1.122 U1.123 U1.127 U1.128 U1.129 U1.132 U1.134 U1.135 U1.136 U1.137 U1.139 U2.5 U3.5 U8.B2 U8.C2 U9.B2 U9.C2 U10.B2 U10.C2 Y2.1
copper on no net: | length 128
  Top Layer w5: 550,3555 550,3669.57
  Top Layer w10: 2191.78,-1375 2201.28,-1384.5

## Polygon pours and split planes (outlines as drawn)
GND on Top Layer "NONET_L02_P-001" (solid, pour order 395): 123,4470 124,4471 4257,4471 4257,141 122,141
5V_VCC on Top Layer (solid, pour order 399): 3307.14,2072.86 3307.53,2013.35 3587.5,1725.84 3587.5,1491.69 3419.5,1329.69 3419.5,1298.69 3477.61,1298.69 3656.5,1483.33 3656.5,1751.69 3402.5,2005.69 3402.5,2053.69 3352.5,2053.69 3344.04,2089.69 3326,2107.73 3326.07,2164 3352.5,2192.5 3352.5,3167.75 3366.5,3186.69 3348.5,3203.69 3307.14,3162.34 3307.53,2192.5 3287,2168.65 3287,2093
5V_VCC on Top Layer "NONET_L02_P-001" (solid, pour order 397): 1334,3406 1334,3428 1330,3428 1324,3434 1324,3465 1299,3465 1299,3436 1291,3428 1284,3428 1284,3406
5V_VCC on Top Layer "NONET_L02_P-001" (solid, pour order 396): 1945,3396.47 1945,3414.46 1938.46,3421 1926.91,3432.54 1927,3461 1901,3461 1901,3431 1887,3417 1887,3396.54
3V3_VCC on Top Layer "NONET_L02_P-001" (solid, pour order 381): 1540,2176 1584,2176 1584,2127.92 1675,2056.63 1675,1899 1699,1875 1733,1875 2095,1875 2169,1801 2169,1258 2081,1258 2081,1743 2007,1817 1704,1817 1655,1866 1655,2035.36 1540,2124.36
5V_VCC on Top Layer "NONET_L02_P-001" (solid, pour order 386): 2788,3006 3117,3006 3124,3013 3124,3035 3107,3052 2778,3052 2778,3006
5V_VCC on Top Layer "NONET_L02_P-001" (solid, pour order 379): 2236,967 2389,967 2408,1074 2510,1199 3112,1204 3142,1234 3142,1332.3 3222,1409 3283,1409 3296,1396 3296,1363 3279,1346 3251,1346 3212,1307 3212,1138 2554.87,1129.24 2487.81,1043.73 2483.13,961.72 2379,838.48 2236,838.48
3V3_VCC on Top Layer "Top Layer-3V3_VCC" (solid, pour order 385): 661,2727 661,2670.47 818,2503 818,2376 871,2323 871,1474 1151,1194 2127,1194 2143,1210 2225,1210 2225,1231 2224,1232 2195,1232 2169,1258 1259,1258 1136,1381 1084,1381 955,1510 955,2379 871,2463 871,2529 701,2699 701,2791 625,2791 625,2763 626,2762
3V3_VCC on Top Layer "NONET_L02_P-001" (solid, pour order 383): 2287,2261.14 2287,2280 2087.74,2479.26 2087.74,2508 2064,2508 2064,2430 2250,2244 2269,2244
3V3_VCC on Top Layer "NONET_L02_P-001" (solid, pour order 382): 1704,1867 1602,1867 1585,1850 1585,1828.12 1599.54,1817 1704,1817
5V_VCC on Top Layer "NONET_L02_P-001" (solid, pour order 380): 406.5,2687 406.5,3235.5 553,3382 553,3411 536,3428 523,3428 359,3264 359,2687
IN-_PM1 on Top Layer "NONET_L02_P-001" (solid, pour order 372): 3572,1209 3594,931 3522.52,733 3429,733 3429,840 3484,931 3520.7,1115.3 3520.7,1209
3V3_VCC on Top Layer "NONET_L02_P-001" (solid, pour order 378): 2233,1130.12 2233,1228 2188,1228 2188,1130.12
5V_VCC on Top Layer "NONET_L02_P-001" (solid, pour order 377): 2254,602 2254,894 2239.16,908.84 2239.16,959 2181,959 2181,888 2150,857 1062.99,857 454,1034.22 454,2687 359,2687 359,945.89 992.77,767 2119,767 2160,726 2160,594 2175,579 2239.16,579
VIN_DCDC on Top Layer "NONET_L02_P-001" (solid, pour order 376): 2957,835 2700,835 2631,904 2631,972 2591,972 2591,899.41 2566,702 2566,592 2582,576 2624,576 2648,600 2648,705 2680,737 2957,737
IN-_PM1 on Top Layer "NONET_L02_P-001" (solid, pour order 375): 3429,840 3402,840 3402,733 3429,733
7V4_GND on Top Layer "NONET_L02_P-001" (solid, pour order 371): 3996,698 3878.83,698 3763,599 3352,599 3352,457 3781,457 3923,599 3996,599
7V4_GND on Top Layer "NONET_L02_P-001" (solid, pour order 374): 3352,599 2821,599 2748,672 2665,672 2663,674 2663,581 2767,477 3351,477
7V4_VCC on Top Layer "NONET_L02_P-001" (solid, pour order 370): 3996.18,710 3989.21,972.79 3597.88,1325.88 3519,1325.88 3519,1248 3578.07,1248 3883,919 3883,710
IN-_PM1 on Top Layer "NONET_L02_P-001" (solid, pour order 373): 3402,840 3076,840 3075,841 3075,735 3073,733 3402,733
5V_VCC on Bottom Layer "NONET_L02_P-001" (solid, pour order 382): 1945,3396.47 1945,3410 1936.75,3421 1889,3421 1885.57,3417 1823.39,3417 1758.9,3471.94 1384.13,3471.94 1327.22,3427.77 524.53,3429.53 499,3404 499,3385 511,3373 542.81,3373 581.37,3406 1344.15,3406 1392.62,3446.96 1750.5,3443.44 1808.65,3396.47
GND on Bottom Layer "NONET_L02_P-001" (solid, pour order 394): 4257,4471 4257,140 122,140 122,4471
5V_VCC on Bottom Layer "NONET_L02_P-001" (solid, pour order 393): 3334.41,3052 3356,3026 3356,3013 3347.95,3004.95 3082.04,3005.6 3072,3014 3072,3032 3091,3052
3V3_VCC on Bottom Layer "NONET_L02_P-001" (solid, pour order 392): 2287,2256 2287,2280 2268,2299 2250,2299 2230,2279 2230,1936 2111,1817 2111,1788 2123,1776 2155,1776 2288,1909 2288,1947
3V3_VCC on Bottom Layer "NONET_L02_P-001" (solid, pour order 389): 2116.19,2449.81 2120,2434 2101.83,2419 2075,2419 2064.34,2429.66 2062.39,3177 2088,3177 2088,2478
3V3_VCC on Bottom Layer "NONET_L02_P-001" (solid, pour order 387): 1644,1849 1626,1867 1507,1867 1475,1899 1475,2074 1419,2130 1419,2214 1408,2225 1390,2225 1380,2212.5 1380,2123.28 1455,2045.36 1455,1871 1509,1817 1637,1817 1644,1824
5V_VCC on Bottom Layer "NONET_L02_P-001" (solid, pour order 380): 3283,1409 3250.5,1409 3241,1399.5 3241,1357 3249,1349 3282,1349 3294,1361 3478,1361 3488,1351 3522,1351 3533,1362 3533,1400 3522,1411 3497.85,1411 3474.31,1393 3299,1393

## Silkscreen, mask and mechanical layers (free items; w line width, h text height)
Top Overlay:
  region: 558.5,462 558.5,488 485.5,508 461.5,508 346.5,470 461.5,440 485.5,440
  region: 1728,476 1674,491 1597,491 1572,500 1448,500 1432,516 1425,516 1421.44,500 718,500 663,540 625,540 604,500 597,500 581,490 565,490 565,461 581,461 597,452 604,452 625,413 663,413 718,452 1421,452 1424,437 1430,437 1448,452 1572,452 1597,461 1674,461
  text "Asfaloth-L2  / Flight Computer  / ver1.1" at 464,556 h80
Top Solder:
  rectangle: 1905,950 2018,1156
Bottom Solder:
  rectangle: 1905.86,949.94 2017.86,1155.94
Mechanical 1:
  lines w10: 4254.86,140 121,140 121,4470.71 4256,4470.71 4256,140
Drill Drawing:
  text ".Legend" at 4436,2062.99 h60

## Dimensions
121,140 to 121,4470.71 on Mechanical 1
121,140 to 4254.86,140 on Mechanical 1

## Text inside footprints (layer, text, board x,y; h text height)
LoRa_downlink: Bottom Overlay "2" at 1040.2,1600.83 h31.5; Bottom Overlay "1" at 1036.26,1699.25 h31.5; Bottom Overlay "21" at 1040.2,2000.43 h31.5; Bottom Overlay "22" at 1040.2,1900.04 h31.5
LoRa_uplink: Bottom Overlay "22" at 2570.2,1900.04 h31.5; Bottom Overlay "21" at 2570.2,2000.43 h31.5; Bottom Overlay "1" at 2566.26,1699.25 h31.5; Bottom Overlay "2" at 2570.2,1600.83 h31.5